# Altium PCB Low PCB.PcbDoc
Units mm, origin at the board's own origin, x right, y up, seen from the top; angles counter-clockwise.
Board outline 175.99 x 168.8 mm, 2 copper layers (Top Layer, Bottom Layer); 38 components, 57 nets, 293 pads, 48 vias.
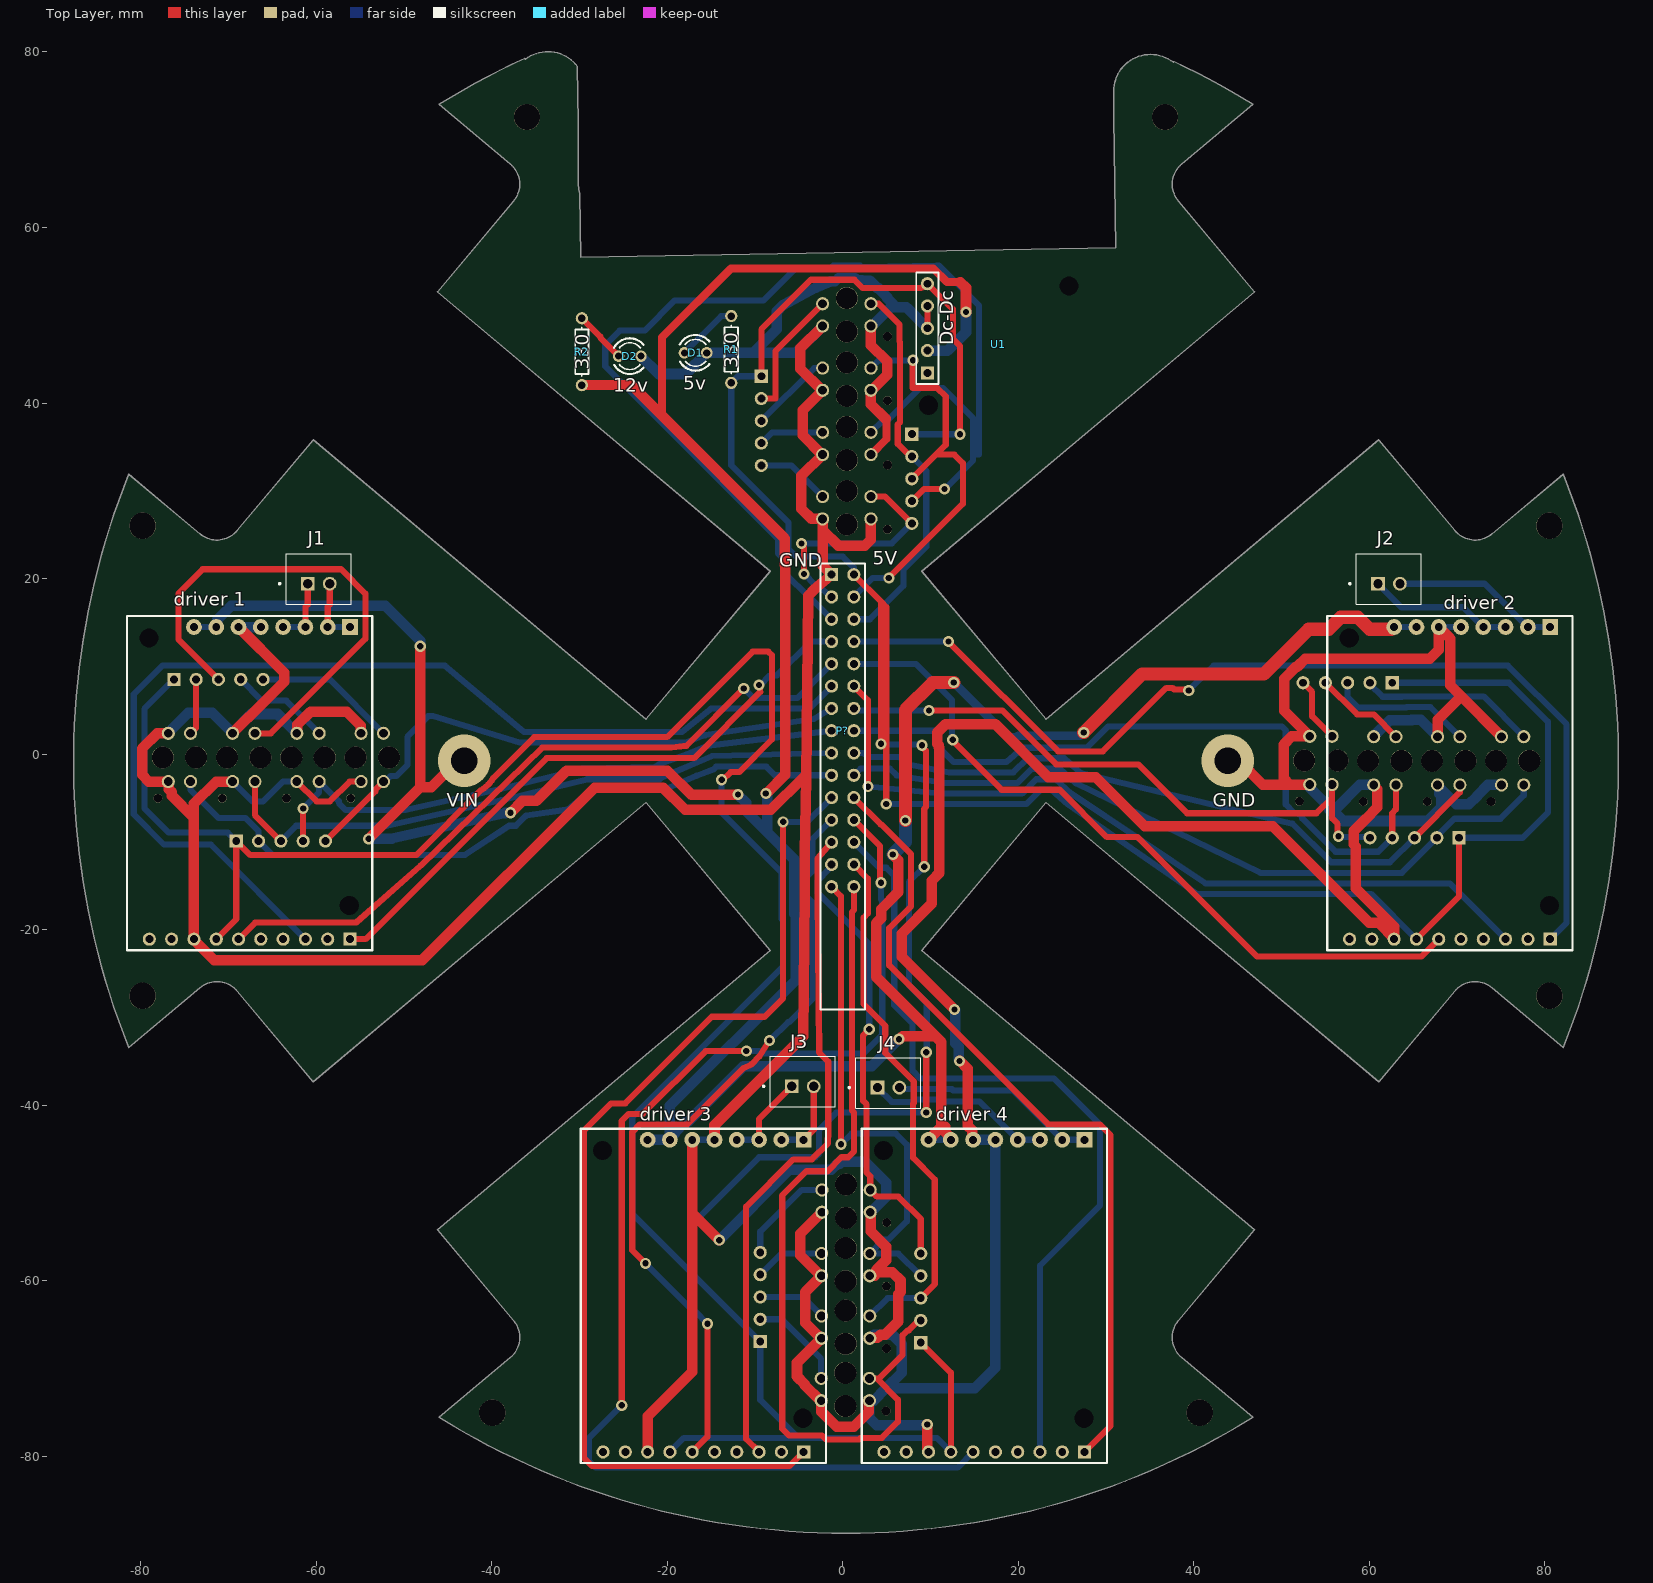
[diagram p0: Top Layer view]
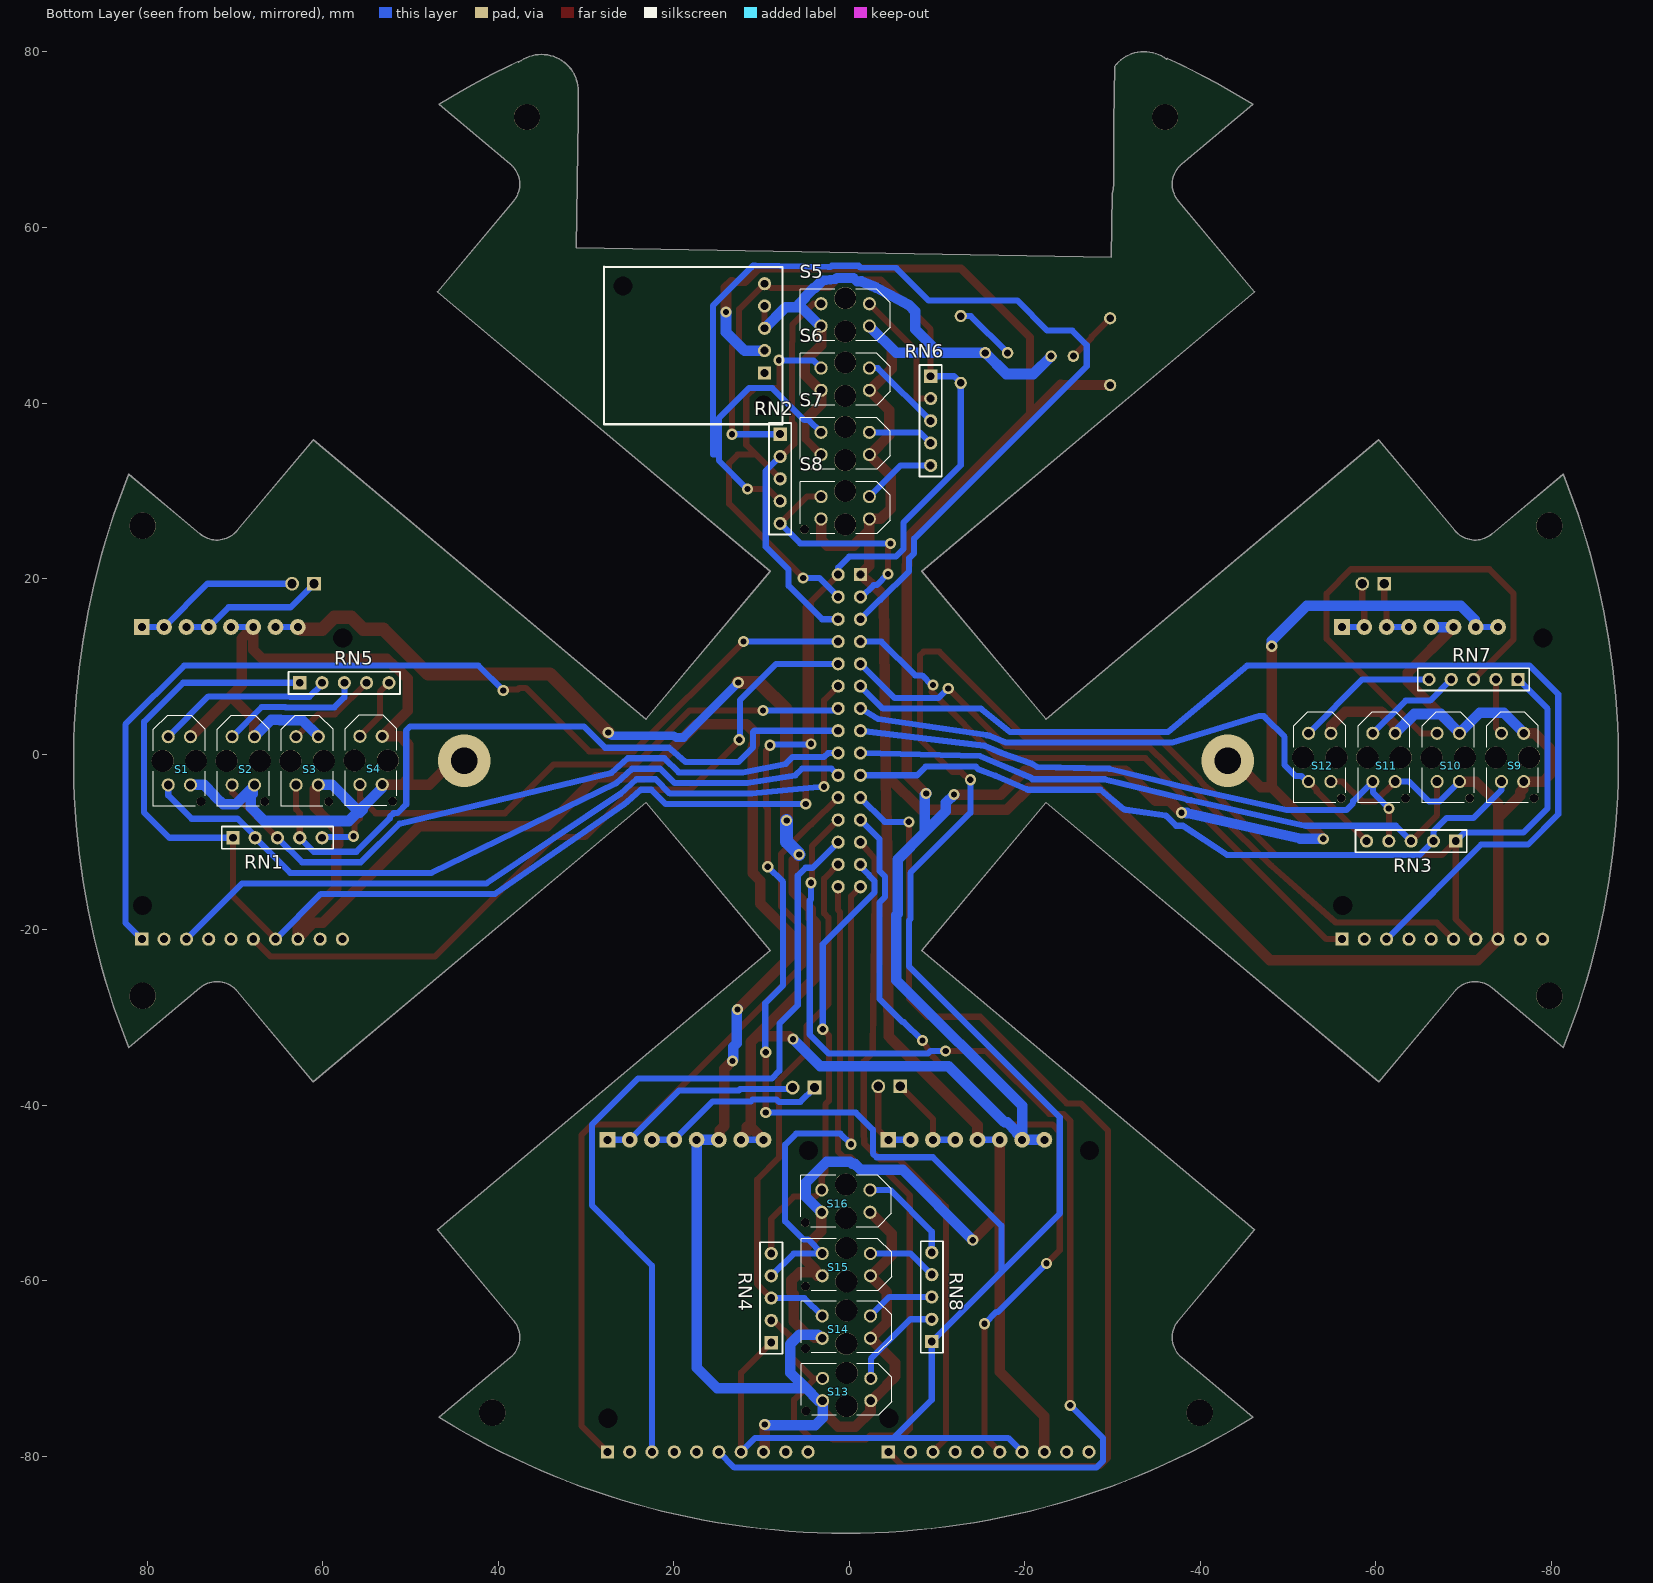
[diagram p1: Bottom Layer view, seen from below]

## Layer stack, top to bottom
Top Solder: solder mask 0.0102, Solder Resist, Dk 3.5
Top Layer: signal copper 0.0356
Dielectric 1: dielectric 0.32, FR-4, Dk 4.8
Bottom Layer: signal copper 0.0356
Bottom Solder: solder mask 0.0102, Solder Resist, Dk 3.5

## Board outline
-81.336,-33.433 -73.222,-26.624 cw(c-71.293,-28.922) -68.995,-26.994 -60.317,-37.335 -22.398,-5.517 -8.257,-22.37 -46.176,-54.188 -37.498,-64.53 cw(c-39.797,-66.458) -37.868,-68.756 -45.983,-75.565 ccw(c0.376,-0.767) 46.735,-75.565 38.621,-68.756 cw(c40.549,-66.458) 38.251,-64.53 46.929,-54.188 9.01,-22.37 23.151,-5.517 61.07,-37.335 69.748,-26.994 cw(c72.046,-28.922) 73.974,-26.624 82.089,-33.433 ccw(c0.376,-0.767) 82.089,31.9 73.974,25.091 cw(c72.046,27.389) 69.748,25.46 61.07,35.802 23.151,3.984 9.01,20.837 46.929,52.655 38.251,62.997 cw(c40.549,64.925) 38.621,67.223 46.735,74.032 ccw(c0.377,-0.766) 37.736,78.909 37.666,78.819 ccw(c35.07,75.497) 30.855,75.497 30.855,72.531 31.122,57.684 -29.825,56.588 -29.956,63.862 cw(c-27.102,64.787) -30.102,64.787 -30.102,71.983 -30.216,78.334 ccw(c-33.6,75.82) -36.164,79.166 -36.233,79.257 ccw(c0.376,-0.767) -45.983,74.032 -37.868,67.223 cw(c-39.797,64.925) -37.498,62.997 -46.176,52.655 -8.257,20.837 -22.398,3.984 -60.317,35.802 -68.995,25.46 cw(c-71.293,27.389) -73.222,25.091 -81.336,31.9 ccw(c0.376,-0.767)

## Design rules (kind name [scope] priority, off if disabled: settings)
Clearance [All] p1: gap=0.5 ignorepadtopadclearanceinfootprint=FALSE
PolygonConnect [All] p1: connectstyle=Relief reliefconductorwidth=0.254 reliefentries=4 polygonreliefangle="90 Angle" airgapwidth=0.254
RoutingVias [All] p1: holewidth=0.711 width=1.27 viastyle="Through Hole" minholewidth=0.711 minwidth=1.27 maxholewidth=0.711 maxwidth=1.27
SolderMaskExpansion [All] p1: expansion=0.102 istentingtop=FALSE
Width [All] p1: maxlimit=2 minlimit=0.6 preferedwidth=0.7 minimp=50.000000 maximp=50.000000 favimp=50.000000
30 further rules are at their usual default settings.

## Components (designator, comment, footprint, x,y, rotation, side; value= is the part's Value field where it differs from the comment)
D1 "5v" LED3MM -16.764,45.72 r0 top
D2 "12v" LED3MM -24.257,45.339 r0 top
"driver 1" "VNH5019" PCBComponent_1#1 -62.23,-6.35 r90 top
"driver 2" "VNH5019" PCBComponent_1#1 74.509,-6.35 r90 top
"driver 3" "VNH5019" PCBComponent_1#1 -10.541,-64.77 r90 top
"driver 4" "VNH5019" PCBComponent_1#1 21.463,-64.77 r90 top
J1 "B2B-XH-A(LF)(SN)" JST_B2B-XH-A(LF)(SN) -59.69,19.939 r0 top
J2 "B2B-XH-A(LF)(SN)" JST_B2B-XH-A(LF)(SN) 62.23,19.939 r0 top
J3 "B2B-XH-A(LF)(SN)" JST_B2B-XH-A(LF)(SN) -4.552,-37.321 r0 top
J4 "B2B-XH-A(LF)(SN)" JST_B2B-XH-A(LF)(SN) 5.207,-37.465 r0 top
P? "Header 20X2" HDR2X20 -1.27,20.447 r270 top
R1 "330" AXIAL-0.3 -12.7,46.101 r270 top value=1K
R2 "330" AXIAL-0.3 -29.718,45.847 r270 top value=1K
RN1 "10K" HDR1X5 70.231,-9.525 r180 bottom
RN2 "10K" HDR1X5 7.874,36.449 r270 bottom
RN3 "10K" HDR1X5 -69.088,-9.906 r0 bottom
RN4 "10K" HDR1X5 8.89,-67.056 r90 bottom
RN5 "330" HDR1X5 62.611,8.128 r180 bottom
RN6 "330" HDR1X5 -9.271,43.053 r270 bottom
RN7 "330" HDR1X5 -76.2,8.509 r0 bottom
RN8 "330" HDR1X5 -9.398,-66.929 r90 bottom
S1 "TCRT5000" OPTO_TCRT5000 76.327,-0.762 r90 bottom
S2 "TCRT5000" OPTO_TCRT5000 69.046,-0.762 r90 bottom
S3 "TCRT5000" OPTO_TCRT5000 61.764,-0.762 r90 bottom
S4 "TCRT5000" OPTO_TCRT5000 54.483,-0.718 r90 bottom
S5 "TCRT5000" OPTO_TCRT5000 0.464,50.038 r180 bottom
S6 "TCRT5000" OPTO_TCRT5000 0.464,42.714 r180 bottom
S7 "TCRT5000" OPTO_TCRT5000 0.464,35.391 r180 bottom
S8 "TCRT5000" OPTO_TCRT5000 0.464,28.067 r180 bottom
S9 "TCRT5000" OPTO_TCRT5000 -75.565,-0.381 r90 bottom
S10 "TCRT5000" OPTO_TCRT5000 -68.241,-0.381 r90 bottom
S11 "TCRT5000" OPTO_TCRT5000 -60.918,-0.381 r90 bottom
S12 "TCRT5000" OPTO_TCRT5000 -53.594,-0.381 r90 bottom
S13 "TCRT5000" OPTO_TCRT5000 0.298,-72.39 r180 bottom
S14 "TCRT5000" OPTO_TCRT5000 0.337,-65.278 r180 bottom
S15 "TCRT5000" OPTO_TCRT5000 0.337,-58.166 r180 bottom
S16 "TCRT5000" OPTO_TCRT5000 0.381,-50.927 r180 bottom
U1 "D24V50F5 5v DC-DC Regulator" PCBComponent_1#2 10.287,37.211 r0 top

## Footprints (in the part's own frame and the unit in brackets; to place one, negate y for a bottom-side part, rotate by r counter-clockwise, add the part's x,y. Pads: shape width x height; smd on the part's side, far side on the other; paste and mask are expansions set on the pad)
AXIAL-0.3 [mm] "Axial Device, Thru-Hole; 2 Leads; 0.3 in Pin Spacing"
  round 1.4 hole 0.85: 1(-3.81,0) 2(3.81,0)
  silkscreen extent -2.77,-0.76 2.77,0.76
HDR1X5 [mm] "Connector; Header; 5 Position"
  rect 1.5x1.5 hole 0.9: 1(0,0)
  round 1.5 hole 0.9: 2(2.54,0) 3(5.08,0) 4(7.62,0) 5(10.16,0)
  silkscreen extent -1.27,-1.27 11.43,1.27
HDR2X20 [mm] "Connector; Header; 20x2 Position"
  rect 1.5x1.5 hole 0.9: 1(0,0)
  round 1.5 hole 0.9: 2(0,2.54) 3(2.54,0) 4(2.54,2.54) 5(5.08,0) 6(5.08,2.54) 7(7.62,0) 8(7.62,2.54) 9(10.16,0) 10(10.16,2.54) 11(12.7,0) 12(12.7,2.54) 13(15.24,0) 14(15.24,2.54) 15(17.78,0) 16(17.78,2.54) 17(20.32,0) 18(20.32,2.54) 19(22.86,0) 20(22.86,2.54) 21(25.4,0) 22(25.4,2.54) 23(27.94,0) 24(27.94,2.54) 25(30.48,0) 26(30.48,2.54) 27(33.02,0) 28(33.02,2.54) 29(35.56,0) 30(35.56,2.54)
  silkscreen extent -1.27,-1.27 49.53,3.81
JST_B2B-XH-A(LF)(SN) [mm]
  rect 1.575x1.575 / inner round 1.575 / far side rect 1.575x1.575 hole 1.05: 1(-1.25,-0.525)
  round 1.575 hole 1.05: 2(1.25,-0.525)
  silkscreen extent -4.55,-2.88 3.7,2.87, body extent -3.7,-2.88 3.7,2.88, height 7
LED3MM [mil]
  round 52 hole 32: A(-50,0) K(50,0)
  silkscreen extent -71,-80 61,80, body extent -63,-63 63,63, height 240
OPTO_TCRT5000 [mm]
  round 1.5 hole 1: A(2.75,1.27) CATH(2.75,-1.27) COLL(-2.75,1.27) E(-2.75,-1.27)
  round 1 hole 1 unplated: ""(-4.65,-2.45)
  round 2.5 hole 2.5 unplated: ""(0,-1.9) ""(0,1.9)
  silkscreen extent -5.15,-2.95 5.15,2.95
PCBComponent_1#1 [mm]
  rect 1.5x1.5 hole 0.9: 1(-14.732,-6.096)
  round 1.5 hole 0.9: 2(-14.732,-3.556) 3(-14.732,-1.016) 4(-14.732,1.524) 5(-14.732,4.064) 6(-14.732,6.604) 7(-14.732,9.144) 8(-14.732,11.684) 9(-14.732,14.224) 10(-14.732,16.764)
  rect 1.8x1.8 hole 0.9: 11(20.828,-6.096)
  round 1.8 hole 0.9: 12(20.828,-3.556) 13(20.828,-1.016) 14(20.828,1.524) 15(20.828,4.064) 16(20.828,6.604) 17(20.828,9.144) 18(20.828,11.684)
  round 1.524 hole 2.18: 20(-10.902,-6.009) 20(19.598,16.804)
  silkscreen extent -16,-8.64 22.1,19.3
PCBComponent_1#2 [mm]
  rect 1.5x1.5 hole 0.9: 1(-0.635,6.223)
  round 1.5 hole 0.9: 2(-0.635,8.763) 3(-0.635,11.303) 4(-0.635,13.843) 5(-0.635,16.383)
  round 1.524 hole 2.184: 6(-0.508,2.54) 7(15.494,16.129)
  silkscreen extent -1.91,4.95 0.64,17.65

## Part data
D1 D2: library part TLLG4400, "Green 569nm LED Indication - Discrete 1.9V Radial", Package=None, Availability="In Stock", Check_prices=https://www.snapeda.com/parts/TLLG4400/Vishay/view-part/?ref=eda, MF="Vishay Semiconductors", MP=TLLG4400, Price=None, Purchase-URL=https://pricing.snapeda.com/search/part/TLLG4400/?ref=eda, SnapEDA_Link=https://www.snapeda.com/parts/TLLG4400/Vishay/view-part/?ref=snap
J1 J2 J3 J4: "Connector Header Through Hole 2 position 0.098 (2.50mm)", Package=None, Check_prices=https://www.snapeda.com/parts/B2B-XH-A(LF)(SN)/JST+Sales+America+Inc./view-part/?ref=eda, MF="JST Sales", MP=B2B-XH-A(LF)(SN), SnapEDA_Link=https://www.snapeda.com/parts/B2B-XH-A(LF)(SN)/JST+Sales+America+Inc./view-part/?ref=snap
P?: "Header, 20-Pin, Dual row", LatestRevisionDate=17-Jul-2002, LatestRevisionNote="Re-released for DXP Platform.", Publisher="Altium Limited"
R1 R2: library part Res1, "Resistor", LatestRevisionDate=17-Jul-2002, LatestRevisionNote="Re-released for DXP Platform.", PackageDescription="Axial Device, Thru-Hole; 2 Leads; 0.3 in Pin Spacing", PackageReference=AXIAL-0.3, Published=8-Jun-2000, Publisher="Altium Limited"
RN1 RN2 RN3 RN4 RN5 RN6 RN7 RN8: library part "Header 5", "Header, 5-Pin", LatestRevisionDate=17-Jul-2002, LatestRevisionNote="Re-released for DXP Platform.", Publisher="Altium Limited"
S1 S2 S3 S4 S5 S6 S7 S8 S9 S10 S11 S12 S13 S14 S15 S16: "950 nm 60 mA Through Hole Reflective Optical Sensor with Transistor Output", Package=None, Availability=Unavailable, MP=TCRT5000, Price=None
U1: library part PLU-D24V50F5

## Free pads (board coordinates)
  round 3 hole 3: 2(-79.767,-27.548) 2(-79.767,26.014) 2(-39.915,-75.042) 2(-35.971,72.584) 2(36.724,72.584) 2(40.667,-75.042) 2(80.52,26.014) 2(80.52,-27.548)

## Via types
v1: diameter 1.27, hole 0.711, Top Layer to Bottom Layer, 46 vias
v2: diameter 6, hole 3, Top Layer to Bottom Layer, 2 vias

## Nets (pads, with @x,y where several pads share a name; then routed paths per layer and width w, separated by ;. In a path a pad name is that pad's centre, name@x,y a point inside that pad or via, vN(x,y) a via of type N, cw(c..) or ccw(c..) an arc to the next point about the centre after c; other vN are vias at no path point)
5v: "driver 1.7" "driver 2.7" "driver 3.7" "driver 4.7" P?.2 R1.2 RN1.1 RN2.1 RN3.1 RN4.1 RN5.1 RN6.1 RN7.1 RN8.1 U1.5 | length 608
  Top Layer w0.7: -71.374,-21.082 -69.088,-18.796 RN3.1 -67.488,-11.506 -48.59,-11.506 -41.166,-4.082 ccw(c-43.124,-0.767) -39.809,-2.725 -35.139,1.945 -20.001,1.945 -10.262,11.684 -8.464,11.684 -8.054,11.274 -8.054,1.674 -11.779,-2.051 -12.773,-2.051 -13.638,-2.915 v1(-13.792,-2.915) ; RN6.1 -9.271,48.387 -3.62,54.038 1.334,54.038 2.286,53.086 8.928,53.086 9.436,53.594 U1.5 12.561,50.685 12.561,47.297 13.36,46.498 v1(13.36,36.449) ; P?.2 4.369,17.348 ; v1(4.369,1.168) 4.369,17.348 ; v1(4.959,-5.696) 4.959,16.758 4.369,17.348 ; RN4.1 12.319,-70.485 12.319,-79.502 ; v1(9.022,1.016) 9.022,0.862 9.481,0.404 9.481,-6.037 9.285,-6.232 v1(9.285,-12.827) ; v1(9.517,-40.843) v1(9.517,-33.96) ; 65.365,-21.082 70.231,-16.216 RN1.1
  Bottom Layer w0.7: RN7.1 -79.565,5.144 -79.565,-6.181 -76.805,-8.941 -70.053,-8.941 RN3.1 ; -19.685,-79.502 -18.085,-77.902 -5.08,-77.902 ; v1(-13.792,-2.915) -13.792,-6.706 -6.97,-13.528 -6.97,-18.785 -6.807,-18.948 -6.807,-24.206 -23.978,-41.377 -23.978,-52.349 -17.323,-59.004 ; RN6.1 -11.938,43.053 R1.2 -12.7,32.916 -6.184,26.4 -6.184,23.388 -5.301,22.504 0,22.504 1.27,21.234 P?.2 ; 3.283,-77.902 -5.08,-77.902 ; 3.284,-77.902 10.719,-77.902 12.319,-79.502 ; v1(4.369,1.168) 4.445,1.092 8.946,1.092 v1(9.022,1.016) ; v1(4.959,-5.696) 20.613,-5.696 20.642,-5.695 20.929,-5.689 22.55,-4.067 23.75,-4.067 25.302,-5.429 25.611,-5.689 40.378,-15.925 40.447,-15.925 60.208,-15.925 65.365,-21.082 ; RN2.1 v1(13.36,36.449) ; v1(9.285,-12.827) 7.544,-14.568 7.544,-26.34 9.576,-28.372 9.576,-33.901 v1(9.517,-33.96) ; v1(9.517,-40.843) -0.737,-40.843 -2.692,-42.799 -2.692,-45.511 -3.102,-45.921 -9.523,-45.921 -17.323,-53.721 -17.323,-59.004 ; RN5.1 75.899,8.128 80.34,3.686 80.34,-6.655 77.47,-9.525 RN1.1 ; -17.323,-59.004 RN8.1 -9.398,-73.584 -5.08,-77.902
10K1: P?.20 RN1.2 S1.COLL | length 85.6
  Bottom Layer w0.7: P?.20 2.044,-1.639 5.362,-1.639 6.137,-2.413 11.618,-3.289 19.645,-3.289 19.934,-3.289 21.556,-1.667 24.744,-1.667 26.563,-3.327 47.622,-13.525 63.691,-13.525 RN1.2 67.691,-9.363 69.688,-7.366 74.93,-7.366 77.597,-4.699 S1.COLL
10K2: P?.18 RN1.3 S2.COLL | length 77.6
  Top Layer w0.7: RN1.3 70.316,-4.36 S2.COLL
  Bottom Layer w0.7: P?.18 2.427,0.127 2.87,-0.317 6.44,-0.317 7.226,-1.102 12.115,-2.089 19.147,-2.089 19.437,-2.089 21.059,-0.467 25.241,-0.467 27.082,-2.128 51.09,-7.918 51.246,-7.918 55.653,-12.325 62.351,-12.325 RN1.3
10K3: P?.16 RN1.4 S3.COLL | length 83.3
  Top Layer w0.7: RN1.4 62.611,-6.731 63.034,-6.308 S3.COLL
  Bottom Layer w0.7: P?.16 10.821,2.667 10.961,2.527 10.961,0.762 12.612,-0.889 18.65,-0.889 20.366,0.567 20.562,0.733 27.826,0.733 30.258,3.164 50.014,3.164 50.483,2.695 50.483,-5.727 51.474,-6.718 51.925,-6.718 52.335,-7.128 52.335,-7.304 56.156,-11.125 61.011,-11.125 RN1.4
10K4: P?.14 RN1.5 S4.COLL | length 70
  Top Layer w0.7: v1(9.83,4.978) 18.191,4.978 24.334,-1.164 33.676,-1.164 39.243,-6.731 53.975,-6.731 55.753,-4.953 ; S4.COLL 55.753,-4.953 ; v1(56.486,-9.355) 56.377,-9.246 56.377,-7.944 55.753,-7.32 55.753,-4.953
  Bottom Layer w0.7: P?.14 1.499,4.978 v1(9.83,4.978) ; v1(56.486,-9.355) 56.571,-9.44 59.986,-9.44 RN1.5
10K5: P?.6 RN2.2 S5.COLL | length 43.9
  Top Layer w0.7: S5.COLL 4.115,51.308 6.477,48.946 6.477,46.999 6.514,46.962 6.514,37.791 6.274,37.551 6.274,35.347 7.712,33.909 RN2.2
  Bottom Layer w0.7: P?.6 3.101,15.367 6.911,19.177 6.911,21.008 9.524,23.621 9.524,32.259 RN2.2
10K6: P?.4 RN2.3 S6.COLL | length 48.4
  Top Layer w0.7: v1(5.258,20.066) 13.694,28.502 13.694,33.147 12.717,34.124 10.629,34.124 ; RN2.3 10.629,34.124 ; v1(7.999,44.872) 7.95,44.823 7.95,41.707 10.795,41.707 11.735,40.767 11.735,35.23 10.629,34.124
  Bottom Layer w0.7: P?.4 3.429,20.066 v1(5.258,20.066) ; S6.COLL 4.061,44.831 7.958,44.831 v1(7.999,44.872)
10K7: P?.5 RN2.4 S7.COLL | length 136.7
  Top Layer w0.7: RN2.4 9.246,30.201 v1(11.608,30.201)
  Bottom Layer w0.7: P?.5 -3.485,17.582 -3.553,17.582 -6.807,20.836 -6.807,22.314 -7.384,22.891 -7.384,24.529 -27.051,44.196 -27.051,46.609 -25.4,48.26 -22.555,48.26 -19.126,51.689 -9.017,51.689 -5.542,55.164 -5.342,55.364 -1.27,55.437 -1.069,55.638 1.997,55.638 2.131,55.503 2.41,55.503 ; 2.41,55.503 2.416,55.503 10.676,55.652 10.973,55.652 11.178,55.447 15.532,51.092 15.532,34.125 14.859,34.125 ; S7.COLL 4.603,38.049 5.105,38.049 8.763,41.707 11.43,41.707 14.859,38.278 14.859,34.125 ; v1(11.608,30.201) 14.859,33.452 14.859,34.125
10K8: P?.3 RN2.5 S8.COLL | length 27.3
  Top Layer w0.7: v1(-4.699,24.003) -4.699,23.849 -4.402,23.552 v1(-4.402,20.531) ; S8.COLL 4.826,29.337 RN2.5
  Bottom Layer w0.7: v1(-4.699,24.003) 5.588,24.003 RN2.5 ; v1(-4.402,20.531) -3.136,19.265 -2.79,19.265 -1.432,17.907 P?.3
10K9: P?.19 RN3.2 S9.COLL | length 81.1
  Bottom Layer w0.7: S9.COLL -74.295,-4.089 -71.12,-7.264 -68.047,-7.264 -66.548,-8.763 RN3.2 -64.948,-11.506 -43.05,-11.506 -38.02,-8.157 -37.238,-8.157 -36.167,-7.086 -36.046,-7.014 -31.48,-6.335 -31.285,-6.306 -28.617,-4.067 -28.362,-4.067 -20.352,-4.067 -20.219,-4.01 -16.652,-2.466 -14.734,-1.757 -14.407,-1.43 -8.704,-1.43 -7.721,-2.413 P?.19
10K10: P?.17 RN3.3 S10.COLL | length 72.7
  Top Layer w0.7: S10.COLL -66.971,-6.943 RN3.3
  Bottom Layer w0.7: RN3.3 -62.269,-8.167 -51.994,-8.167 -39.064,-5.289 -38.898,-5.257 -38.495,-5.191 -29.114,-2.867 -28.859,-2.867 -20.849,-2.867 -20.645,-2.663 -14.904,-0.23 P?.17
10K11: P?.15 RN3.4 S11.COLL | length 68.5
  Top Layer w0.7: RN3.4 v1(-61.468,-6.189)
  Bottom Layer w0.7: v1(-61.468,-6.189) -59.648,-4.369 S11.COLL -57.404,-5.375 -57.404,-5.588 -56.611,-6.381 -49.828,-6.381 -39.561,-4.089 -38.995,-3.992 -29.611,-1.667 -21.421,-1.469 -20.732,-1.053 -17.33,0.134 -15.414,0.957 P?.15
10K12: P?.13 RN3.5 S12.COLL | length 66.6
  Top Layer w0.7: RN3.5 -53.264,-4.242 -53.264,-4.071 S12.COLL
  Bottom Layer w0.7: S12.COLL -52.164,-3.131 -51.514,-2.481 -50.824,-2.481 -49.594,-1.251 -49.594,1.968 -47.39,4.172 -47.216,4.346 -46.691,4.346 -36.815,1.334 -17.827,1.334 -15.97,2.099 -15.661,2.157 -3.331,3.989 P?.13
10K13: P?.30 RN4.2 S13.COLL | length 97.5
  Top Layer w0.7: P?.30 1.27,-17.777 1.07,-17.977 1.07,-40.616 1.282,-40.828 1.282,-45.288 0.635,-45.935 -0.139,-45.935 -1.727,-47.523 -4.14,-47.523 -6.883,-50.267 -6.883,-76.86 -6.121,-77.622 -2.359,-77.622 -1.891,-78.09 1.872,-78.09 2.06,-77.902 4.47,-77.902 6.299,-76.073 6.299,-73.533 3.886,-71.12 ; S13.COLL 3.886,-71.12 ; RN4.2 8.674,-64.516 7.53,-65.659 7.385,-65.659 6.833,-66.211 6.833,-68.453 4.166,-71.12 3.886,-71.12
10K14: P?.28 RN4.3 S14.COLL | length 61
  Top Layer w0.7: P?.28 2.87,-14.173 2.87,-18.156 2.381,-18.645 2.381,-28.489 4.851,-30.959 4.851,-34.036 8.094,-37.279 8.094,-39.751 8.026,-39.819 8.026,-45.999 10.49,-48.463 10.49,-60.376 RN4.3
  Bottom Layer w0.7: S14.COLL 5.119,-61.976 RN4.3
10K15: P?.29 RN4.4 S15.COLL | length 59.6
  Top Layer w0.7: P?.29 -0.203,-16.18 v1(-0.203,-44.45)
  Bottom Layer w0.7: v1(-0.203,-44.45) 1.015,-43.232 6.046,-43.232 7.315,-44.501 7.315,-53.213 5.232,-55.296 4.687,-55.296 S15.COLL 6.35,-56.896 RN4.4
10K16: P?.27 RN4.5 S16.COLL | length 51.9
  Top Layer w0.7: v1(3.023,-31.344) 2.319,-32.047 2.319,-39.505 2.718,-39.903 2.718,-47.676 3.131,-48.089 S16.COLL 3.893,-50.419 6.35,-50.419 8.89,-52.959 RN4.5
  Bottom Layer w0.7: P?.27 -1.27,-12.789 -2.229,-13.748 -2.229,-13.809 -2.87,-14.45 -2.87,-15.776 3.023,-21.668 v1(3.023,-31.344)
330O1: RN5.2 S1.A | length 20.2
  Bottom Layer w0.7: RN5.2 60.071,7.966 61.509,6.528 63.713,6.528 63.753,6.568 73.017,6.568 S1.A
330O2: RN5.3 S2.A | length 16.3
  Bottom Layer w0.7: RN5.3 57.531,6.477 58.68,5.328 64.21,5.328 64.251,5.368 66.935,5.368 S2.A
330O3: RN5.4 S3.A | length 10.6
  Top Layer w0.7: RN5.4 58.598,4.521 60.501,4.521 S3.A
330O4: RN5.5 S4.A | length 7.5
  Top Layer w0.7: RN5.5 53.483,7.096 53.483,4.302 S4.A
330O5: RN6.2 S5.A | length 14.6
  Top Layer w0.7: RN6.2 -7.671,40.513 -7.671,45.923 S5.A
330O6: RN6.3 S6.A | length 9.5
  Bottom Layer w0.7: RN6.3 -3.26,43.984 S6.A
330O7: RN6.4 S7.A | length 7.5
  Bottom Layer w0.7: RN6.4 -8.043,36.661 S7.A
330O8: RN6.5 S8.A | length 8.5
  Bottom Layer w0.7: RN6.5 -5.842,32.893 S8.A
330O9: RN7.2 S9.A | length 6.4
  Top Layer w0.7: S9.A -73.66,3.004 RN7.2
330O10: RN7.3 S10.A | length 57.5
  Top Layer w0.7: RN7.3 -75.667,13.056 -75.667,18.313 -72.923,21.057 -57.15,21.057 -54.381,18.288 -54.381,13.139 -65.151,2.369 S10.A
330O11: RN7.4 S11.A | length 11.5
  Bottom Layer w0.7: RN7.4 -66.167,6.096 -63.375,6.096 S11.A
330O12: RN7.5 S12.A | length 16.3
  Bottom Layer w0.7: RN7.5 -58.464,8.509 S12.A
330O13: RN8.2 S13.A | length 11
  Bottom Layer w0.7: RN8.2 -6.96,-64.389 -2.452,-68.897 S13.A
330O14: RN8.3 S14.A | length 7.9
  Bottom Layer w0.7: RN8.3 -4.572,-61.849 S14.A
330O15: RN8.4 S15.A | length 8
  Bottom Layer w0.7: RN8.4 -6.985,-56.896 S15.A
330O16: RN8.5 S16.A | length 11.4
  Bottom Layer w0.7: RN8.5 -9.398,-54.407 -4.648,-49.657 S16.A
GND: "driver 1.8" "driver 1.15" "driver 1.16" "driver 2.8" "driver 2.15" "driver 2.16" "driver 3.8" "driver 3.15" "driver 3.16" "driver 4.8" "driver 4.15" "driver 4.16" D1.K D2.K P?.1 S1.CATH S1.E S2.CATH S2.E S3.CATH S3.E S4.CATH S4.E S5.CATH S5.E S6.CATH S6.E S7.CATH S7.E S8.CATH S8.E S9.CATH S9.E S10.CATH S10.E S11.CATH S11.E S12.CATH S12.E S13.CATH S13.E S14.CATH S14.E S15.CATH S15.E S16.CATH S16.E U1.3 U1.4 | length 819.5
  Top Layer w0.7: S11.E -59.934,-5.385 -58.42,-5.385 -56.166,-3.131 S12.E ; 9.627,-79.35 9.779,-79.502 ; U1.3 U1.4
  Top Layer w0.9: S7.E 4.974,35.881 4.974,38.104 4.875,38.203
  Top Layer w1.2: S9.CATH -76.863,2.397 -78.07,2.397 -79.756,0.711 -79.756,0.651 -79.815,0.592 -79.815,-2.369 -79.053,-3.131 S9.E -76.778,-3.188 -76.778,-4.006 -76.415,-4.368 -76.415,-4.738 -73.914,-7.239 ; S10.E -71.381,-3.131 -73.914,-5.664 -73.914,-7.239 ; S10.CATH -69.511,2.445 -67.738,4.219 -67.661,4.219 -63.627,8.253 -63.627,9.271 -68.834,14.478 ; S11.CATH -62.13,2.426 -62.13,3.326 -60.631,4.826 -56.507,4.826 -54.921,3.24 -54.921,2.426 S12.CATH ; -22.225,-79.502 -22.225,-75.438 -17.145,-70.358 -17.145,-52.299 ; -17.145,-43.942 -17.145,-52.299 ; -14.605,-43.942 -14.605,-42.269 -4.847,-32.511 -4.501,-32.165 -4.32,-15.906 -4.32,-11.31 -4.173,-2.679 -3.942,18.053 -3.245,18.751 -1.42,20.297 P?.1 -1.651,20.828 -2.286,21.463 -2.286,25.527 ; v1(-14.072,-55.372) -17.145,-52.299 ; -4.503,-2.675 -8.178,-6.35 -17.932,-6.35 -20.472,-3.81 -28.241,-3.81 -47.926,-23.495 -71.577,-23.495 -73.914,-21.158 -73.914,-7.239 ; S16.CATH -4.826,-54.654 -4.826,-57.099 -2.489,-59.436 S15.CATH -4.263,-61.286 -4.263,-64.774 -2.489,-66.548 S14.CATH -5.207,-69.342 -5.207,-70.905 -4.302,-71.81 -4.302,-71.886 -2.49,-73.698 -2.414,-73.698 -2.414,-74.902 -0.675,-76.64 1.271,-76.64 2.991,-74.921 2.991,-73.717 S13.E ; S5.CATH -4.826,46.228 -4.826,43.908 -2.362,41.444 S6.CATH -4.572,39.158 -4.572,36.33 -2.362,34.121 S7.CATH -4.699,31.708 -4.699,27.94 -3.556,26.797 S8.CATH -2.286,25.527 ; S14.E 3.144,-66.491 3.962,-66.491 4.324,-66.128 4.865,-66.128 6.35,-64.643 6.35,-61.516 6.587,-61.279 6.587,-59.953 5.65,-59.016 3.822,-59.016 3.822,-58.778 4.937,-57.662 4.937,-56.13 3.188,-54.381 3.188,-52.254 S16.E ; S15.E S15.E@3.664,-59.436 ; S8.E 3.214,24.427 2.511,23.724 -0.483,23.724 -2.286,25.527 ; S5.E 3.214,46.601 5.064,44.751 5.064,43.218 3.29,41.444 S6.E 3.214,39.864 4.875,38.203 ; 9.627,-79.35 v1(9.627,-76.378) ; v1(12.725,-29.083) 6.731,-23.089 6.731,-20.447 10.16,-17.018 10.16,-14.406 11.02,-13.546 11.02,0.711 10.931,0.8 10.931,1.004 10.757,1.177 10.757,2.463 11.722,3.428 17.384,3.428 23.426,-2.614 28.82,-2.614 34.436,-8.23 48.997,-8.23 59.999,-19.232 61.051,-19.232 62.825,-21.006 62.825,-21.082 62.825,-19.645 58.471,-15.291 58.471,-10.541 58.221,-10.291 58.221,-8.759 59.563,-7.417 59.572,-7.417 60.914,-6.075 60.914,-4.013 60.494,-3.593 S3.E ; v1(13.319,-34.95) 14.224,-35.855 14.224,-42.333 14.744,-42.853 14.744,-43.827 14.859,-43.942 ; v2(43.876,-0.767) 45.175,-0.767 47.876,-3.468 50.936,-3.468 ; S4.E 50.936,-3.468 ; S2.CATH 67.776,3.895 70.463,6.582 ; S1.CATH 70.463,6.582 ; 50.936,-3.468 50.233,-2.765 50.233,1.092 51.173,2.032 S4.CATH 50.292,4.953 50.292,8.585 51.685,9.978 51.812,9.978 52.705,10.871 66.878,10.871 67.905,11.898 67.905,14.478 69.215,13.168 69.215,7.83 70.463,6.582
  Bottom Layer w0.7: S10.E -67.258,-5.385 -66.04,-5.385 -63.786,-3.131 S11.E ; -17.145,-43.942 -14.605,-43.942 ; 67.905,14.478 70.445,14.478
  Bottom Layer w1.1: -1.382,53.848 -1.334,53.848 -0.879,53.848 -0.489,54.238 1.417,54.238 1.552,54.103 3.068,53.955
  Bottom Layer w1.2: S9.CATH -76.835,2.445 -74.581,4.699 -71.841,4.699 S10.CATH -69.511,2.445 -67.385,4.572 -64.391,4.572 S11.CATH ; -68.834,14.478 -66.294,14.478 ; D2.K -20.955,43.307 -17.907,43.307 D1.K -10.185,45.72 ; v1(-14.072,-55.372) -6.071,-47.371 -1.286,-47.371 -0.592,-46.677 -0.322,-46.677 -0.076,-46.431 2.591,-46.431 4.981,-48.821 4.981,-50.423 3.207,-52.197 S16.E ; S5.CATH -5.334,45.72 -10.185,45.72 ; -1.382,53.848 -3.052,53.158 -6.815,51.133 -7.518,50.43 -7.518,48.387 -10.185,45.72 ; 3.068,53.955 3.865,53.158 3.98,53.158 5.064,52.074 5.064,51.959 5.711,51.312 ; S14.E 3.168,-66.548 3.588,-66.128 5.65,-66.128 6.731,-67.209 6.731,-70.46 4.928,-72.263 ; S5.E 3.295,48.768 5.454,50.927 7.239,50.927 ; 7.324,50.842 U1.3 ; v1(9.627,-76.378) 9.608,-76.378 9.533,-76.452 3.884,-76.452 3.048,-75.616 S13.E 3.531,-73.66 4.928,-72.263 ; v1(12.725,-29.083) 12.806,-29.164 12.806,-32.915 13.21,-33.319 13.21,-34.841 v1(13.319,-34.95) ; 14.859,-43.942 17.399,-43.942 17.399,-69.901 15.037,-72.263 4.928,-72.263 ; S4.E 53.27,-3.525 53.27,-3.867 57.023,-7.62 66.65,-7.62 68.196,-6.075 68.196,-4.749 67.97,-4.524 S2.E@67.97,-4.202 ; 55.753,-6.68 55.423,-6.35 56.083,-6.35 58.921,-3.512 S3.E ; S3.CATH 60.494,2.064 62.308,3.878 64.811,3.878 64.851,3.918 65.845,3.918 S2.CATH ; S2.E S2.E@67.97,-3.707 ; S2.E@67.836,-3.648 69.902,-5.715 71.349,-5.715 72.277,-4.787 72.277,-4.749 73.514,-3.512 S1.E
INA1: "driver 1.1" P?.7 | length 69.6
  Top Layer w0.7: -56.134,-21.082 -54.364,-21.082 -33.737,-0.455 -16.933,-0.455 -9.394,7.083 -9.43,7.119 -9.43,7.765 v1(-9.539,7.874)
  Bottom Layer w0.7: v1(-9.539,7.874) -9.385,7.874 -8.287,8.972 -7.505,8.972 -3.651,12.827 P?.7
INA2: "driver 2.1" P?.8 | length 118.7
  Top Layer w0.7: v1(12.04,12.827) 24.562,0.305 29.642,0.305 36.881,7.544 37.582,7.544 37.757,7.368 39.312,7.368 v1(39.421,7.259)
  Bottom Layer w0.7: P?.8 v1(12.04,12.827) ; v1(39.421,7.259) 42.246,10.084 75.768,10.084 82.474,3.378 82.474,-19.213 80.605,-21.082
INA3: "driver 3.1" P?.21 | length 119.1
  Top Layer w0.7: v1(-6.782,-7.715) -6.782,-27.813 -8.895,-29.926 -14.915,-29.926 -24.781,-39.792 -26.393,-39.792 -29.489,-42.888 -29.489,-80.188 -28.575,-81.102 -6.045,-81.102 -4.445,-79.502
  Bottom Layer w0.7: v1(-6.782,-7.715) -4.032,-7.715 P?.21
INA4: "driver 4.1" P?.22 | length 93.5
  Top Layer w0.7: P?.22 4.332,-8.015 4.4,-8.015 7.8,-11.415 7.8,-17.327 5.281,-19.846 5.281,-24.077 23.393,-42.189 29.312,-42.189 30.531,-43.409 30.531,-76.53 27.559,-79.502
INB1: "driver 1.6" P?.9 | length 81
  Top Layer w0.7: -68.834,-21.082 -66.954,-19.202 -55.485,-19.202 -55.417,-19.192 -48.093,-12.706 -34.234,0.745 -19.504,0.745 -17.795,0.95 v1(-11.265,7.48)
  Bottom Layer w0.7: v1(-11.265,7.48) -11.246,7.48 -10.154,6.389 -5.168,6.389 P?.9
INB2: "driver 2.6" P?.10 | length 83.9
  Top Layer w0.7: v1(12.545,1.639) 12.545,1.501 18.11,-4.064 24.714,-4.064 30.099,-9.449 33.604,-9.449 47.193,-23.038 65.949,-23.038 67.905,-21.082
  Bottom Layer w0.7: P?.10 8.343,10.287 12.446,6.184 12.446,1.738 v1(12.545,1.639)
INB3: "driver 3.6" P?.23 | length 89.6
  Top Layer w0.7: v1(-22.479,-58.014) -23.975,-56.518 -23.975,-43.053 -23.114,-42.192 -17.731,-42.192 -11.525,-35.985 -11.32,-35.78 -10.36,-35.31 -9.49,-34.44 v1(-8.331,-32.625) ; -17.145,-79.502 -15.41,-77.767 v1(-15.41,-64.897)
  Bottom Layer w0.7: v1(-22.479,-58.014) -16.942,-63.551 -16.756,-63.551 v1(-15.41,-64.897) ; v1(-8.331,-32.625) -6.23,-30.523 -6.063,-30.523 -3.429,-27.89 -3.429,-16.914 -4.07,-16.273 -4.07,-13.953 -3.429,-13.312 -3.429,-9.652 P?.23
INB4: "driver 4.6" P?.24 | length 144.9
  Top Layer w0.7: v1(-25.175,-74.197) -25.175,-41.783 -24.384,-40.992 -22.78,-40.992 -15.613,-33.825 v1(-10.975,-33.825) ; P?.24 4.23,-10.453 4.23,-14.127 4.246,-14.143 4.246,-14.546 v1(4.355,-14.656)
  Bottom Layer w0.7: v1(-25.175,-74.197) -28.905,-77.927 -28.905,-80.518 -28.143,-81.28 13.081,-81.28 14.859,-79.502 ; v1(-10.975,-33.825) -9.231,-33.825 -8.946,-34.11 2.356,-34.11 4.508,-31.959 4.508,-16.691 4.355,-16.538 v1(4.355,-14.656)
NetD1_A: D1.A R1.1 | length 7.1
  Bottom Layer w0.7: D1.A -13.843,49.911 R1.1
NetD2_A: D2.A R2.1 | length 6.1
  Top Layer w0.7: R2.1 -27.61,47.549 -27.61,47.422 D2.A
"Netdriver 1_11": "driver 1.11" "driver 1.12" J1.2 | length 7.6
  Top Layer w0.7: -58.674,14.478 -58.674,16.815 -58.44,17.049 J1.2
  Bottom Layer w0.7: -58.674,14.478 -56.134,14.478
"Netdriver 1_13": "driver 1.13" "driver 1.14" J1.1 | length 7.6
  Top Layer w0.7: -61.214,14.478 -61.214,16.789 -60.94,17.063 J1.1
  Bottom Layer w0.7: -63.754,14.478 -61.214,14.478
"Netdriver 2_11": "driver 2.11" "driver 2.12" J2.2 | length 19.2
  Bottom Layer w0.7: J2.2 73.129,19.414 78.065,14.478 80.605,14.478
"Netdriver 2_13": "driver 2.13" "driver 2.14" J2.1 | length 16.6
  Bottom Layer w0.7: J2.1 63.655,16.739 70.724,16.739 72.985,14.478 75.525,14.478
"Netdriver 3_11": "driver 3.11" "driver 3.12" J3.2 | length 9.1
  Top Layer w0.7: -4.445,-43.942 -3.302,-42.799 J3.2
  Bottom Layer w0.7: -6.985,-43.942 -4.445,-43.942
"Netdriver 3_13": "driver 3.13" "driver 3.14" J3.1 | length 10.2
  Top Layer w0.7: -9.525,-43.942 -9.525,-41.569 J3.1
  Bottom Layer w0.7: -12.065,-43.942 -9.525,-43.942
"Netdriver 4_11": "driver 4.11" "driver 4.12" J4.2 | length 23.6
  Bottom Layer w0.7: J4.2 6.625,-38.158 12.439,-38.158 12.588,-38.307 19.384,-38.307 25.019,-43.942 27.559,-43.942
"Netdriver 4_13": "driver 4.13" "driver 4.14" J4.1 | length 21.2
  Bottom Layer w0.7: J4.1 5.595,-39.628 8.011,-39.628 8.28,-39.358 11.012,-39.358 11.227,-39.573 15.57,-39.573 19.939,-43.942 22.479,-43.942
PWM1: "driver 1.3" P?.11 | length 124.7
  Bottom Layer w0.7: -61.214,-21.082 -71.999,-10.297 -77.326,-10.297 -80.765,-6.858 -80.765,6.814 -77.47,10.109 -45.601,10.109 -45.346,10.109 -36.318,2.534 -18.568,2.534 -18.324,2.534 -15.171,5.037 -14.98,5.189 -3.828,5.189 P?.11
PWM2: "driver 2.3" P?.12 | length 91.8
  Top Layer w0.7: P?.12 2.87,6.147 v1(2.87,-3.707)
  Bottom Layer w0.7: v1(2.87,-3.707) 11.121,-4.489 20.432,-4.489 22.053,-2.867 24.247,-2.867 26.08,-4.51 41.355,-14.725 69.168,-14.725 75.525,-21.082
PWM3: "driver 3.3" P?.25 | length 76.2
  Top Layer w0.7: -9.525,-79.502 -10.998,-78.029 -10.998,-51.562 -5.613,-46.177 -3.505,-46.177 -1.7,-44.372 -1.651,-42.976 -1.651,-35.027 -2.665,-34.012 -2.87,-15.914 -2.87,-11.91 P?.25
PWM4: "driver 4.3" P?.26 | length 93.3
  Bottom Layer w0.7: P?.26 4.191,-12.954 4.978,-12.954 5.867,-13.843 5.867,-28.615 7.964,-30.712 7.964,-36.093 8.828,-36.958 24.08,-36.958 29.312,-42.189 29.312,-51.435 22.479,-58.268 22.479,-79.502
VINBAT: "driver 1.17" "driver 1.18" "driver 2.17" "driver 2.18" "driver 3.17" "driver 3.18" "driver 4.17" "driver 4.18" R2.2 U1.2 | length 440.8
  Top Layer w0.9: -20.574,38.532 -20.574,47.498 -12.734,55.338 10.312,55.338 11.873,53.777 13.406,53.777
  Top Layer w1.2: v1(-54,-9.652) -48.133,-3.785 ; v1(-48.133,12.294) -48.133,-3.785 ; v2(-43.124,-0.767) -43.877,-0.767 -46.895,-3.785 -48.133,-3.785 ; v1(-37.853,-6.672) -37.834,-6.672 -36.5,-5.337 -34.896,-5.337 -31.464,-1.905 -19.972,-1.905 -17.227,-4.65 -13.074,-4.65 -13.052,-4.628 -11.951,-4.628 v1(-11.938,-4.615) ; R2.2 -24.105,42.062 -20.574,38.532 -6.604,24.562 -6.604,21.588 -6.557,21.541 -6.557,-2.325 -8.673,-4.441 -8.703,-4.441 -8.738,-4.476 v1(-8.757,-4.476) ; v1(5.715,-11.43) 5.715,-11.449 6.35,-12.084 6.35,-15.709 4.404,-17.655 4.404,-18.673 3.831,-19.246 3.831,-25.392 10.57,-32.131 ; v1(6.401,-32.475) 6.474,-32.475 6.818,-32.131 10.57,-32.131 ; 9.779,-43.942 11.252,-42.469 11.252,-32.814 10.57,-32.131 ; 11.684,-42.469 11.684,-43.091 12.319,-43.726 12.319,-43.942 ; 13.406,53.777 14.046,53.137 v1(14.046,50.368)
  Top Layer w1.5: v1(7.137,-7.569) 7.137,5.029 10.262,8.153 v1(12.649,8.153) ; v1(27.457,2.464) 34.138,9.144 48.006,9.144 53.086,14.224 55.372,14.224 56.736,15.588 58.674,15.588 60.038,14.224 62.49,14.224 62.744,14.478 62.825,14.478
  Bottom Layer w0.7: -73.914,14.478 -71.374,14.478 ; 9.779,-43.942 12.319,-43.942 ; 62.825,14.478 65.365,14.478
  Bottom Layer w1: v1(12.649,8.153) 18.605,2.198 18.898,1.905 19.726,1.905 20.003,2.083 27.076,2.083 v1(27.457,2.464)
  Bottom Layer w1.2: -71.374,14.478 -71.259,14.593 -71.259,15.295 -69.663,16.891 -52.112,16.891 -48.146,12.926 -48.146,12.307 v1(-48.133,12.294) ; v1(-54,-9.652) -51.393,-9.617 -38.459,-6.707 v1(-37.853,-6.672) ; -22.225,-43.942 -19.685,-43.942 -19.685,-43.78 -19.145,-43.24 -19.145,-43.114 -17.973,-41.942 -17.685,-41.942 -11.303,-35.56 3.316,-35.56 v1(6.401,-32.475) ; -19.685,-43.114 -19.685,-40.081 -5.357,-25.753 -5.357,-18.348 -5.52,-18.185 -5.52,-12.006 -8.611,-8.915 ; v1(-11.938,-4.615) -11.938,-4.634 -11.011,-5.561 -11.011,-6.515 -8.611,-8.915 ; v1(-8.757,-4.476) -8.757,-4.495 -8.611,-4.642 -8.611,-8.915 ; U1.2 11.938,45.974 14.046,48.082 v1(14.046,50.368)
  Bottom Layer w1.5: v1(5.715,-11.43) 7.137,-10.008 v1(7.137,-7.569)
pads on no net: "driver 1.2" "driver 1.4" "driver 1.5" "driver 1.9" "driver 1.10" "driver 1.20" "driver 2.2" "driver 2.4" "driver 2.5" "driver 2.9" "driver 2.10" "driver 2.20" "driver 3.2" "driver 3.4" "driver 3.5" "driver 3.9" "driver 3.10" "driver 3.20" "driver 4.2" "driver 4.4" "driver 4.5" "driver 4.9" "driver 4.10" "driver 4.20" S1. S2. S3. S4. S5. S6. S7. S8. S9. S10. S11. S12. S13. S14. S15. S16. U1.1 U1.6 U1.7

## Silkscreen, mask and mechanical layers (free items; w line width, h text height)
Top Overlay:
  text "Dc-Dc" at 12.573,46.609 h1.52 r90
  text "5V" at 3.429,21.59 h1.52
  text "GND" at -7.239,21.336 h1.52
  text "VIN" at -45.085,-5.969 h1.52
  text "GND" at 42.164,-5.969 h1.52
Mechanical 1:
  the board outline again, w1.2